# Altium PCB PCB2.PcbDoc
Units mil, origin at the board's own origin, x right, y up, seen from the top; angles counter-clockwise.
Board outline 6000 x 4000 mil, 2 copper layers (Top Layer, Bottom Layer); 20 components, 22 nets, 142 pads, 4 vias.
Unrouted connection lines stored in the file: 2.
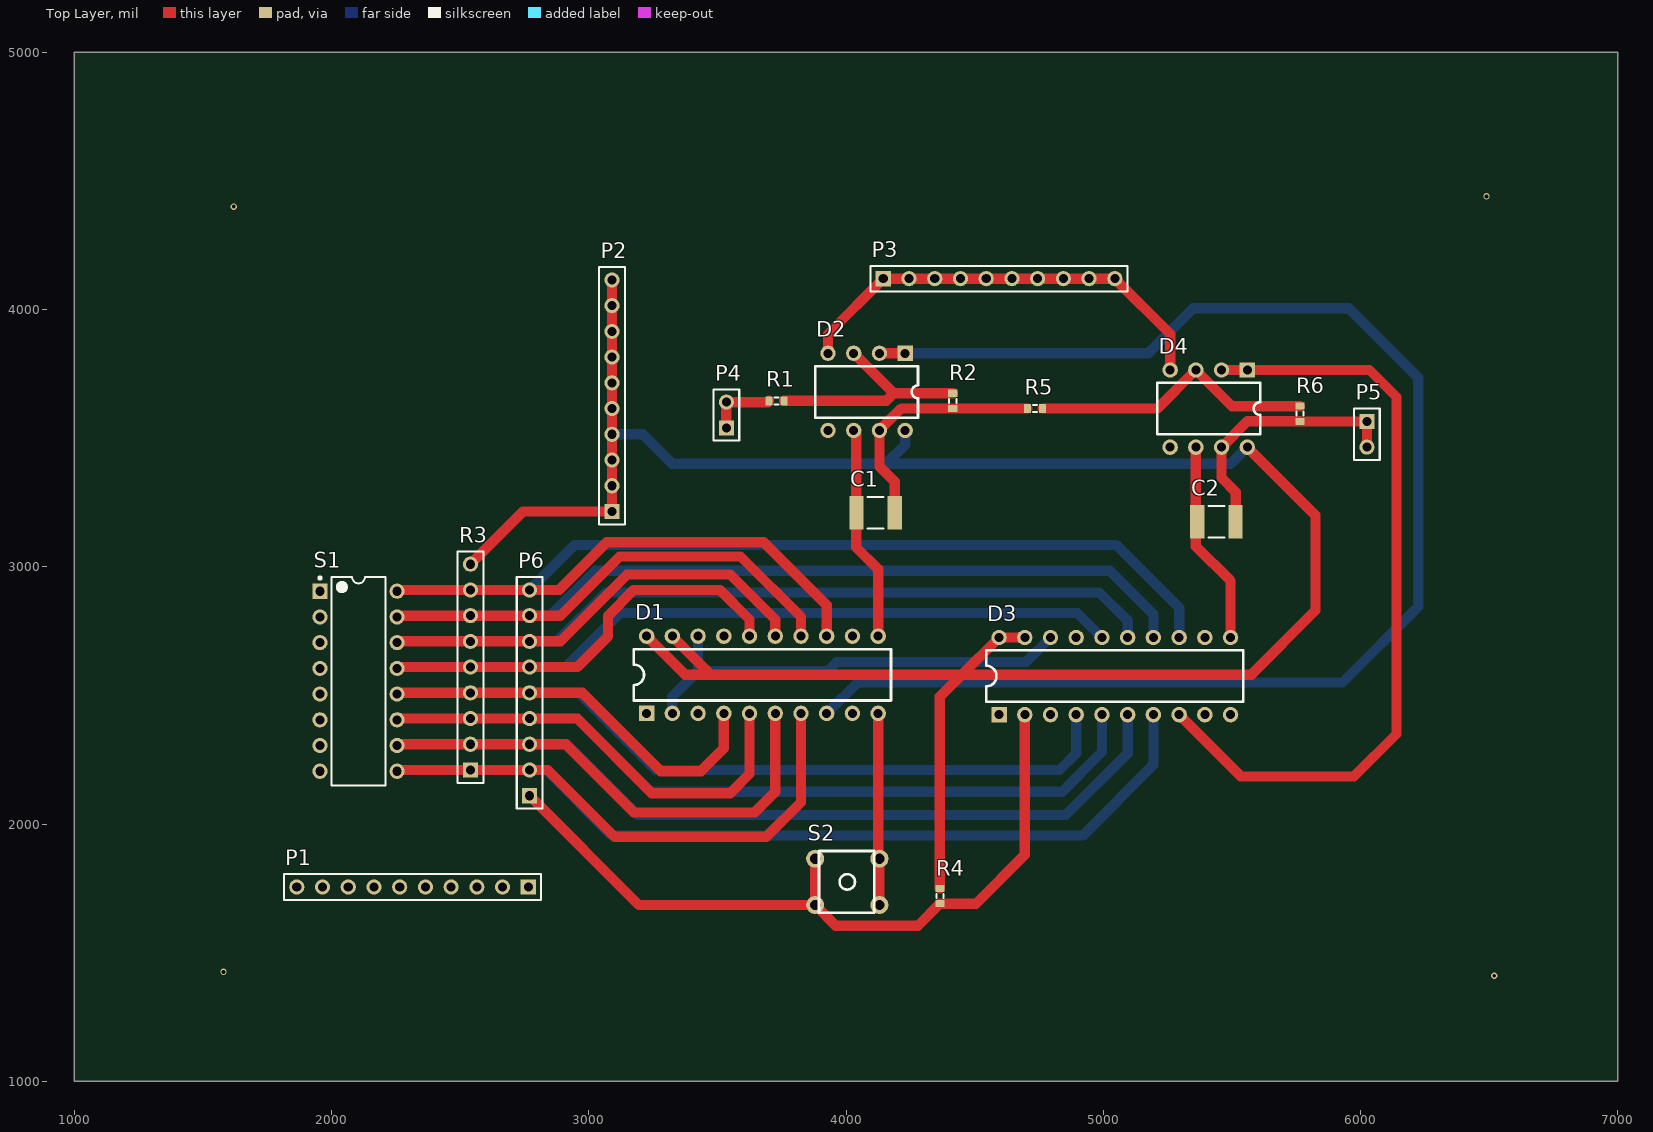
[diagram p0: Top Layer view]
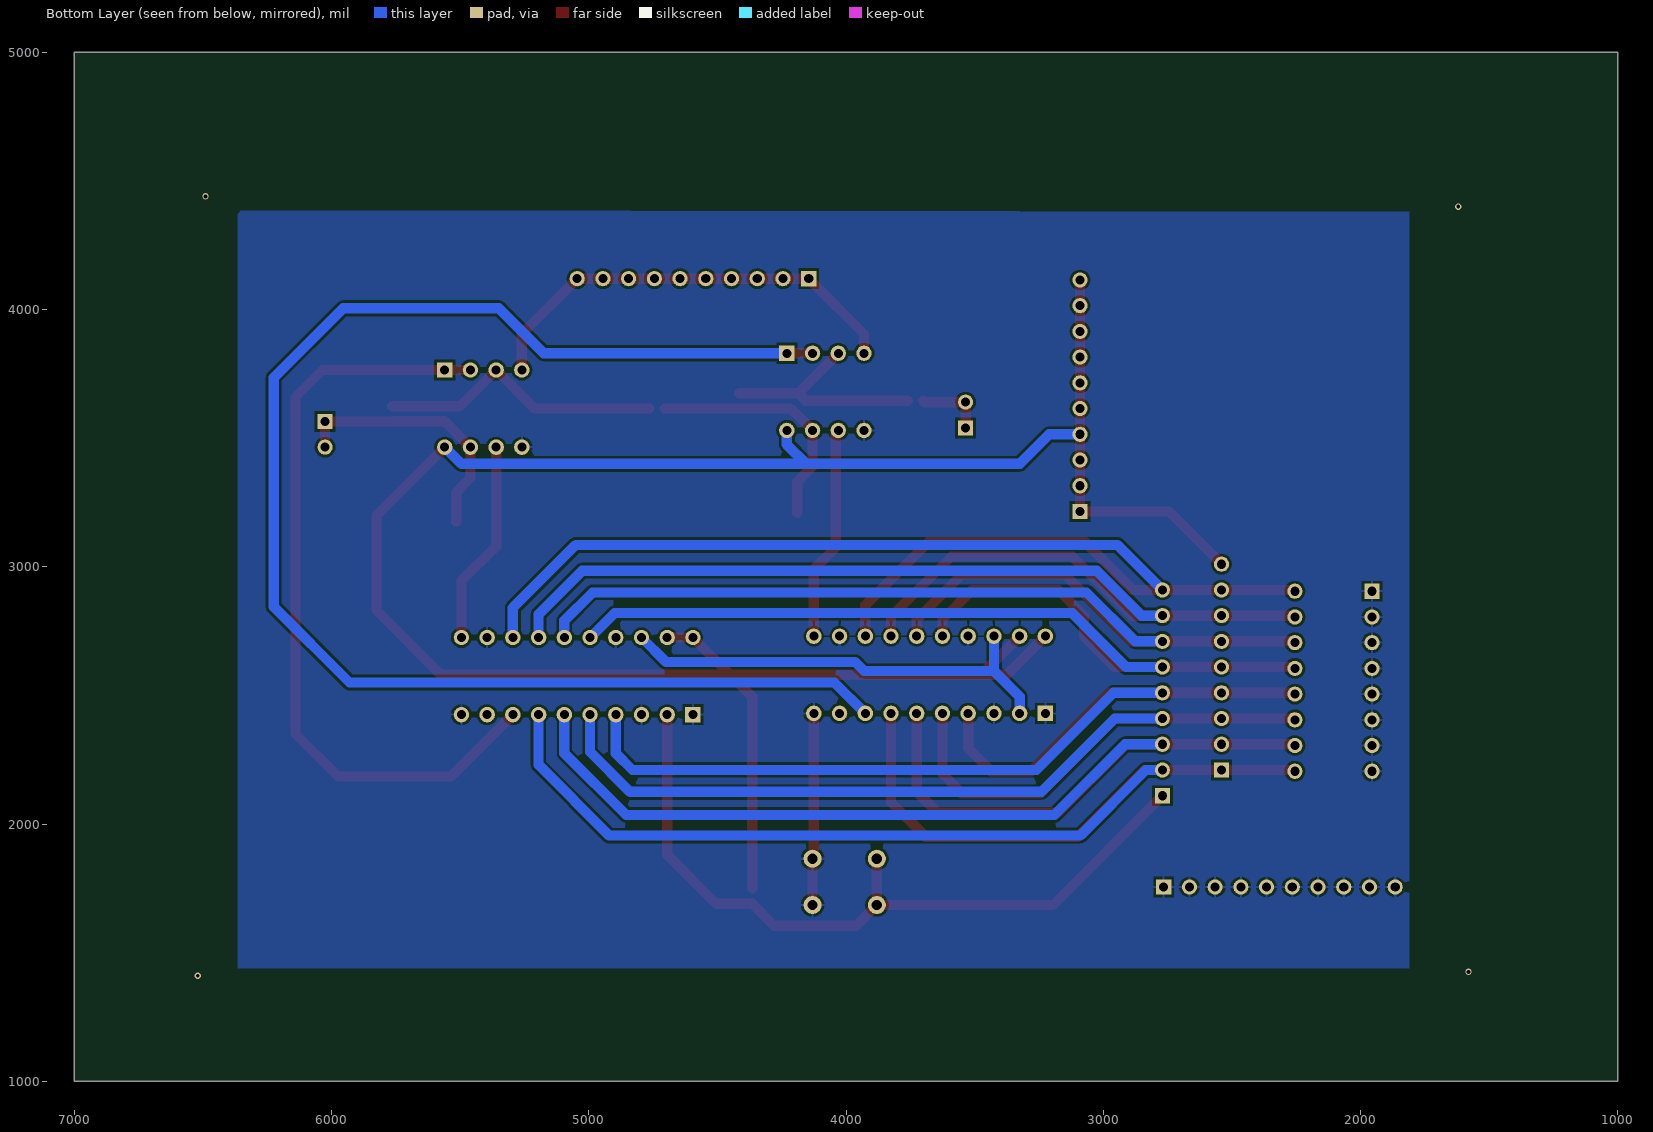
[diagram p1: Bottom Layer view, seen from below]

## Layer stack, top to bottom
Top Solder: solder mask 0.4, Solder Resist, Dk 3.5
Top Layer: signal copper 1.4
Dielectric 1: dielectric 12.6, FR-4, Dk 4.8
Bottom Layer: signal copper 1.4
Bottom Solder: solder mask 0.4, Solder Resist, Dk 3.5

## Board outline
1000,1000 7000,1000 7000,5000 1000,5000

## Design rules (kind name [scope] priority, off if disabled: settings)
Clearance [All] p1: gap=10
PolygonConnect [All] p1: connectstyle=Relief reliefconductorwidth=10 reliefentries=4 polygonreliefangle="90 Angle" airgapwidth=10
RoutingVias [All] p1: holewidth=28 width=50 viastyle="Through Hole" minholewidth=28 minwidth=50 maxholewidth=28 maxwidth=50
SolderMaskExpansion [All] p1: expansion=4
Width [All] p1: maxlimit=60 minlimit=10 preferedwidth=40
30 further rules are at their usual default settings.

## Components (designator, comment, footprint, x,y, rotation, side; value= is the part's Value field where it differs from the comment)
C1 "Cap Pol3" 1812 4115,3210 r180 top
C2 "Cap Pol3" 1812 5440,3175 r0 top
D1 "DAC" DIP-20N 3225,2430 r90 top
D2 "D" DIP-8N 4230,3830 r270 top
D3 "DAC" DIP-20N 4595,2425 r90 top
D4 "D" DIP-8N 5560,3765 r270 top
P1 "Header 10" HDR1X10 2765,1755 r180 top
P2 "Header 10" HDR1X10 3090,3215 r90 top
P3 "Header 10" HDR1X10 4145,4120 r0 top
P4 "Header 2" HDR1X2 3535,3540 r90 top
P5 "Header 2" HDR1X2 6025,3565 r270 top
P6 "Header 9" HDR1X9 2770,2110 r90 top
R1 "Res3" J1-0603 3730,3645 r0 top
R2 "Res3" J1-0603 4415,3645 r270 top
R3 "Res 9" HDR1X9 2540,2210 r90 top
R4 "Res3" J1-0603 4365,1720 r270 top
R5 "Res3" J1-0603 4734.53,3615 r0 top
R6 "Res3" J1-0603 5765,3595 r270 top
S1 "SW DIP-8" DIP-16 2105,2555 r0 top
S2 "SW-DPST" AN66 4005,1775 r270 top

## Footprints (in the part's own frame and the unit in brackets; to place one, negate y for a bottom-side part, rotate by r counter-clockwise, add the part's x,y. Pads: shape width x height; smd on the part's side, far side on the other; paste and mask are expansions set on the pad)
1812 [mm] "Chip Capacitor, Body 4.5x3.2mm, IPC High Density"
  rect 1.4x3.3 smd: 1(-1.9,0) 2(1.9,0)
  silkscreen extent -0.8,-1.55 0.8,1.55, body extent -2.4,-1.7 2.4,1.7, height 1.4
AN66 [mil]
  round 70 hole 40: 1(-90,125) 1(90,125) 2(-90,-125) 2(90,-125)
  silkscreen extent -120,-110 120,105
DIP-8N [mil]
  rect 60x60 hole 35: 1(0,0)
  round 60 hole 35: 2(0,-100) 3(0,-200) 4(0,-300) 5(300,-300) 6(300,-200) 7(300,-100) 8(300,0)
  silkscreen extent 50,-350 250,50
DIP-16 [mm] "DIP; 16 Leads; Row Spacing 7.62 mm; Pitch 2.54 mm"
  rect 1.5x1.5 hole 0.9: 1(-3.81,8.89)
  round 1.5 hole 0.9: 2(-3.81,6.35) 3(-3.81,3.81) 4(-3.81,1.27) 5(-3.81,-1.27) 6(-3.81,-3.81) 7(-3.81,-6.35) 8(-3.81,-8.89) 9(3.81,-8.89) 10(3.81,-6.35) 11(3.81,-3.81) 12(3.81,-1.27) 13(3.81,1.27) 14(3.81,3.81) 15(3.81,6.35) 16(3.81,8.89)
  silkscreen extent -3.93,-10.3 2.65,10.31, body extent -3.6,-10.28 3.6,10.28, height 5.08
DIP-20N [mil]
  rect 60x60 hole 35: 1(0,0)
  round 60 hole 35: 2(0,-100) 3(0,-200) 4(0,-300) 5(0,-400) 6(0,-500) 7(0,-600) 8(0,-700) 9(0,-800) 10(0,-900) 11(300,-900) 12(300,-800) 13(300,-700) 14(300,-600) 15(300,-500) 16(300,-400) 17(300,-300) 18(300,-200) 19(300,-100) 20(300,0)
  silkscreen extent 50,-950 250,50
HDR1X2 [mm] "Connector; Header; 2 Position"
  rect 1.5x1.5 hole 0.9: 1(0,0)
  round 1.5 hole 0.9: 2(2.54,0)
  silkscreen extent -1.27,-1.27 3.81,1.27
HDR1X9 [mm] "Connector; Header; 9 Position"
  rect 1.5x1.5 hole 0.9: 1(0,0)
  round 1.5 hole 0.9: 2(2.54,0) 3(5.08,0) 4(7.62,0) 5(10.16,0) 6(12.7,0) 7(15.24,0) 8(17.78,0) 9(20.32,0)
  silkscreen extent -1.27,-1.27 21.59,1.27
HDR1X10 [mm] "Connector; Header; 10 Position"
  rect 1.5x1.5 hole 0.9: 1(0,0)
  round 1.5 hole 0.9: 2(2.54,0) 3(5.08,0) 4(7.62,0) 5(10.16,0) 6(12.7,0) 7(15.24,0) 8(17.78,0) 9(20.32,0) 10(22.86,0)
  silkscreen extent -1.27,-1.27 24.13,1.27
J1-0603 [mm] "Chip Resistor, Body 1.6x0.8mm, IPC High Density"
  rect 0.7x0.9 smd: 1(-0.75,0) 2(0.75,0)
  silkscreen extent -0.2,-0.35 0.2,0.35, body extent -0.85,-0.48 0.85,0.48, height 0.9

## Part data
C1 C2: "Polarized Capacitor (Surface Mount)"
D1 D3: library part DAC0832
D2 D4: library part TL082
P1 P2 P3: "Header, 10-Pin"
P4 P5: "Header, 2-Pin"
P6: "Header, 9-Pin"
R1 R2 R4 R5 R6: "Resistor"
S1: "DIP Switch, 8 Position, SPST"
S2: library part 6x6开关

## Via types
v1: diameter 25, hole 15, Top Layer to Bottom Layer, 4 vias

## Nets (pads, with @x,y where several pads share a name; then routed paths per layer and width w, separated by ;. In a path a pad name is that pad's centre, name@x,y a point inside that pad or via, vN(x,y) a via of type N, cw(c..) or ccw(c..) an arc to the next point about the centre after c; other vN are vias at no path point)
5V: D1.19 D1.20 D2.8 D3.19 D3.20 D4.8 P2.1 P2.2 P2.3 P2.4 P2.5 P2.6 P2.7 P2.8 P2.9 P2.10 R3.9 R4.1 | length 9133.9
  Top Layer w40: R3.9 2745,3215 P2.1 P2.2 P2.3 P2.4 P2.5 P2.6 P2.7 P2.8 P2.9 P2.10 ; D1.20 3375,2580 3475,2580 ; D1.19 3475,2580 ; R4.1 4365,2495 4450,2580 ; D3.19 D3.20 4450,2580 ; D4.8 5825,3200 5825,2830 5575,2580 4450,2580 ; 3475,2580 4450,2580
  Bottom Layer w40: P2.4 3210,3515 3325,3400 4155,3400 ; D2.8 4230,3475 4155,3400 ; D4.8 5495,3400 4155,3400
-5V: D2.4 D4.4 P3.1 P3.2 P3.3 P3.4 P3.5 P3.6 P3.7 P3.8 P3.9 P3.10 | length 1723.1
  Top Layer w40: D2.4 3930,3905 P3.1 P3.2 P3.3 P3.4 P3.5 P3.6 P3.7 P3.8 P3.9 P3.10 5260,3905 D4.4
GND: D1.1 D1.3 D1.10 D1.12 D1.17 D2.5 D3.1 D3.3 D3.10 D3.12 D3.17 D4.5 P1.1 P1.2 P1.3 P1.4 P1.5 P1.6 P1.7 P1.8 P1.9 P1.10 S1.1 S1.2 S1.3 S1.4 S1.5 S1.6 S1.7 S1.8 S2.1 | length 747.1
  Top Layer w40: D1.10 4125,1870 4130,1865 S2.1@4130,1685
NetC1_1: C1.1 D2.7 R2.2 R5.1 | length 955.4
  Top Layer w40: C1.1 4189.8,3330.2 4130,3390 D2.7 4215.47,3615.47 R2.2 4415.47,3615 R5.1
NetC1_2: C1.2 D1.11 D2.6 | length 839.4
  Top Layer w40: D2.6 4040.2,3519.8 C1.2 4040.2,3074.8 4125,2990 D1.11
NetC2_1: C2.1 D3.11 D4.6 | length 795.9
  Top Layer w40: D4.6 5360,3080 5495,2945 D3.11
NetC2_2: C2.2 D4.7 P5.1 P5.2 R6.2 | length 1019.5
  Top Layer w40: C2.2 5514.8,3290.2 5460,3345 D4.7 5560.47,3565.47 R6.2 5765.47,3565 P5.1 P5.2
NetD1_2: D1.2 D1.18 D3.2 D3.18 P6.1 R4.2 S2.2 | length 4738.6
  Top Layer w40: P6.1 3195,1685 S2.2@3880,1685 ; S2.2@3880,1865 S2.2@3880,1685 ; D3.2 4695,1880 4505.47,1690.47 R4.2 4365,1690 4280,1605 3960,1605 S2.2@3880,1685
  Bottom Layer w40: D1.2 3325,2495 3425,2595 ; D1.18 3425,2595 ; D3.18 4700,2630 3965,2630 3930,2595 3425,2595
NetD1_4: D1.4 D3.4 P6.5 R3.4 S1.12 | length 3996.9
  Top Layer w40: S1.12 2260,2510 R3.4 P6.5 2975,2510 3280,2205 3435,2205 3525,2295 D1.4
  Bottom Layer w40: P6.5 2960,2510 3260,2210 4830,2210 4895,2275 D3.4
NetD1_5: D1.5 D3.5 P6.4 R3.3 S1.11 | length 4310.5
  Top Layer w40: S1.11 2260,2410 R3.3 P6.4 2955,2410 3245,2120 3550,2120 3625,2195 D1.5
  Bottom Layer w40: P6.4 2955,2410 3240,2125 4840,2125 4995,2280 D3.5
NetD1_6: D1.6 D3.6 P6.3 R3.2 S1.10 | length 4608.3
  Top Layer w40: S1.10 2260,2310 R3.2 P6.3 2910,2310 3175,2045 3645,2045 3725,2125 D1.6
  Bottom Layer w40: P6.3 2915,2310 3190,2035 4855,2035 5095,2275 D3.6
NetD1_7: D1.7 D3.7 P6.2 R3.1 S1.9 | length 4920.2
  Top Layer w40: S1.9 2260,2210 R3.1 P6.2 2840,2210 3100,1950 3690,1950 3825,2085 D1.7
  Bottom Layer w40: P6.2 2835,2210 3090,1955 4920,1955 5195,2230 D3.7
NetD1_8: D1.8 D2.1 D2.2 | length 5641.2
  Top Layer w40: D2.2 D2.1
  Bottom Layer w40: D1.8 4045,2550 5930,2550 6225,2845 6225,3735 5955,4005 5350,4005 5175,3830 D2.1
NetD1_13: D1.13 D3.13 P6.9 R3.8 S1.16 | length 4784.2
  Top Layer w40: S1.16 2260,2910 R3.8 P6.9 2885,2910 3070,3095 3680,3095 3925,2850 D1.13
  Bottom Layer w40: P6.9 2945,3085 5050,3085 5295,2840 D3.13
NetD1_14: D1.14 D3.14 P6.8 R3.7 S1.15 | length 4497.6
  Top Layer w40: S1.15 2260,2810 R3.7 P6.8 2890,2810 3120,3040 3590,3040 3825,2805 D1.14
  Bottom Layer w40: P6.8 2850,2810 3025,2985 5025,2985 5195,2815 D3.14
NetD1_15: D1.15 D3.15 P6.7 R3.6 S1.14 | length 4231.5
  Top Layer w40: S1.14 2260,2710 R3.6 P6.7 2890,2710 3150,2970 3550,2970 3725,2795 D1.15
  Bottom Layer w40: P6.7 2875,2710 3065,2900 4985,2900 5095,2790 D3.15
NetD1_16: D1.16 D3.16 P6.6 R3.5 S1.13 | length 4007.2
  Top Layer w40: S1.13 2260,2610 R3.5 P6.6 2955,2610 3075,2730 3075,2810 3175,2910 3510,2910 3625,2795 D1.16
  Bottom Layer w40: P6.6 2910,2610 3120,2820 4900,2820 D3.16
NetD2_3: D2.3 R1.2 R2.1 | length 887.6
  Top Layer w40: R1.2 4155.95,3645 4185.47,3674.53 ; D2.3 4185.47,3674.53 ; R2.1 4185.47,3674.53
NetD3_8: D3.8 D4.1 D4.2 | length 3046.2
  Top Layer w40: D3.8 5535,2185 5975,2185 6140,2350 6140,3660 6035,3765 D4.1 D4.2
NetD3_12: 
NetD4_3: D4.3 R5.2 R6.1 | length 1121.3
  Top Layer w40: R5.2 5210,3615 D4.3 5500.47,3624.53 R6.1
NetP4_1: P4.1 P4.2 R1.1 | length 267.5
  Top Layer w40: P4.1 P4.2 3695.47,3640 R1.1
pads on no net: D1.9 D3.9
copper on no net:
  other v1: 6520,1410 1580,1425 1620,4400 6490,4440

## Polygon pours and split planes (outlines as drawn)
GND on Bottom Layer "Top Layer-No Net" (solid, pour order 10): 1810,4380 1810,1440 6365,1440 6365,4385